# Altium PCB MX-01._AD封装.PcbDoc
Units mil, origin at the board's own origin, x right, y up, seen from the top; angles counter-clockwise.
Board outline 6000 x 4000 mil, 2 copper layers (Top, Bottom), stack 2.8 mil thick; 1 components, 0 nets, 18 pads, 0 vias.
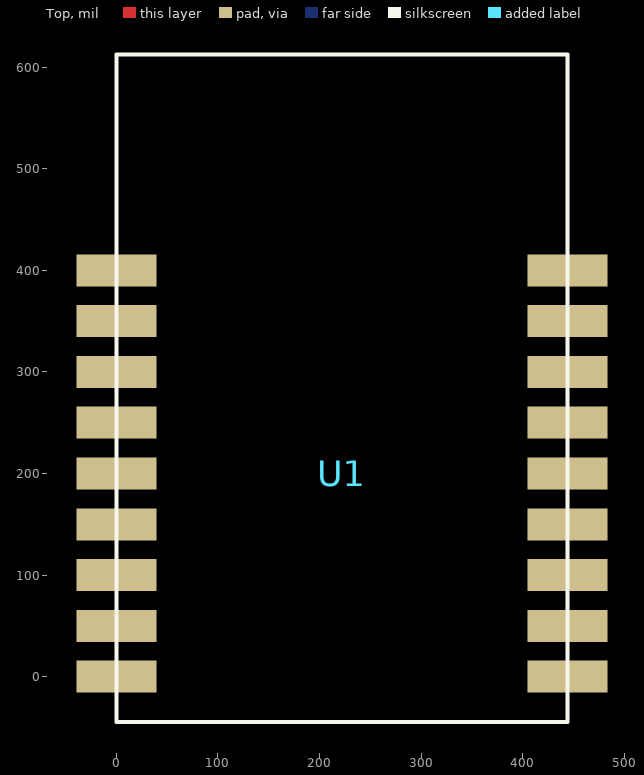
[diagram p0: Top view]
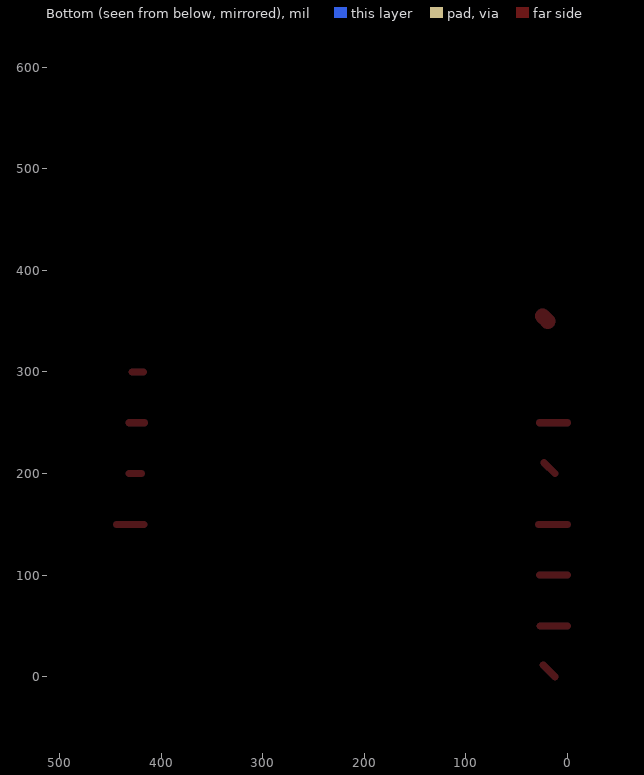
[diagram p1: Bottom view, seen from below]

## Layer stack, top to bottom
Solder Mask Top: solder mask 0.4, Solder Resist, Dk 3.5
Top: signal copper 1.4
Bottom: signal copper 1.4
Solder Mask Bottom: solder mask 0.4, Solder Resist, Dk 3.5

## Board outline
-29721.65,-30046.57 -23721.65,-30046.57 -23721.65,-26046.57 -29721.65,-26046.57

## Design rules (kind name [scope] priority, off if disabled: settings)
Clearance "Clearance - Default - DEFAULT- SMD" [IsVia vs IsSMTPin] p1: gap=12
Clearance "Clearance - Default - DEFAULT - Via" [IsVia vs IsVia] p2: gap=12
Clearance "Clearance - Default - DEFAULT - Net" [All] p3: gap=10
ComponentClearance "ComponentClearance - Default - DEFAULT" [All] p1: gap=10 collisioncheckmode=3 verticalgap=10 showdistances=FALSE
FanoutControl Fanout_Small [(CompPinCount < 5)] p3: bgadir=Out bgaviamode=Centered fanoutstyle=Auto fanoutdirection=OutThenIn viagrid=1 // Fanout_Small (Default Rule)
FanoutControl Fanout_SOIC [IsSOIC] p4: bgadir=Out bgaviamode=Centered fanoutstyle=Auto fanoutdirection=Alternating viagrid=1 // Fanout_SOIC (Default Rule)
HoleToHoleClearance "HoleToHoleClearance - Default - DEFAULT" [All] p1: gap=10 allowstackedmicrovias=TRUE
Length "Default Length" [All] p1: maxlimit=50000 minlimit=0
MaxMinImpedance "Default Impedance" [All] p1: minimum=50.00 maximum=150.0
ParallelSegment "Default Parallel Segment Adjasent" [All] p1: limit=1000 gap=200
ParallelSegment "Default Parallel Segment Same Layer" [All] p2: limit=1000 gap=200
PlaneConnect "Default PlaneConnect" [All] p1: planeconnectstyle=Relief reliefexpansion=20 reliefentries=0 reliefconductorwidth=10 reliefairgap=10
PolygonConnect "PolygonConnect - Default SMT" [IsSMTPin] p1: connectstyle=Direct reliefconductorwidth=10 reliefentries=4 polygonreliefangle="45 Angle" airgapwidth=10
PolygonConnect "PolygonConnect - Default Pad" [All] p2: connectstyle=Direct reliefconductorwidth=10 reliefentries=4 polygonreliefangle="45 Angle" airgapwidth=10
RoutingLayers "RoutingLayers - Default - DEFAULT" [All] p1: top layer_v5=TRUE bottom layer_v5=TRUE
RoutingPriority "RoutingPriority - Default - DEFAULT" [All] p1: routingpriority=0
RoutingTopology "Default Routing Topology" [All] p1: topology=Shortest
RoutingVias "RoutingVias - Default - DEFAULT" [All] p1: holewidth=28 width=50 viastyle="Through Hole" minholewidth=28 minwidth=50 maxholewidth=28 maxwidth=50
SMDToCorner "SMDToCorner - Default - DEFAULT" [All] p1: distance=120000
SolderMaskExpansion [All] p1: expansion=4
Width "Default Width" [All] p1: maxlimit=100 minlimit=6 preferedwidth=10
20 further rules are at their usual default settings.

## Components (designator, comment, footprint, x,y, rotation, side; value= is the part's Value field where it differs from the comment)
U1 "XY001" XY001 0,-24.8 r0 top

## Footprints (in the part's own frame and the unit in brackets; to place one, negate y for a bottom-side part, rotate by r counter-clockwise, add the part's x,y. Pads: shape width x height; smd on the part's side, far side on the other; paste and mask are expansions set on the pad)
XY001 [mm]
  rect 2x0.8 smd: 1(0,10.79) 2(0,9.52) 3(0,8.25) 4(0,6.98) 5(0,5.71) 6(0,4.44) 7(0,3.17) 8(0,1.9) 9(0,0.63) 10(11.28,0.63) 11(11.28,1.9) 12(11.28,3.17) 13(11.28,4.44) 14(11.28,5.71) 15(11.28,6.98) 16(11.28,8.25) 17(11.28,9.52) 18(11.28,10.79)
  Top lines w0.178: 0,1.9 0.69,1.9 ; 0,3.17 0.7,3.17 ; 0,4.44 0.72,4.44 ; 0,6.98 0.7,6.98 ; 0.317,0.63 0.607,0.92 ; 0.317,5.71 0.587,5.98 ; 10.58,6.98 10.963,6.98 ; 10.59,4.44 11.28,4.44 ; 10.6,8.25 10.887,8.25 ; 10.65,5.71 10.963,5.71
  Top lines w0.381: 0.494,9.52 0.625,9.65
  silkscreen extent 0,-0.5 11.28,16.19

## Nets (pads, with @x,y where several pads share a name; then routed paths per layer and width w, separated by ;. In a path a pad name is that pad's centre, name@x,y a point inside that pad or via, vN(x,y) a via of type N, cw(c..) or ccw(c..) an arc to the next point about the centre after c; other vN are vias at no path point)
pads on no net: U1.1 U1.2 U1.3 U1.4 U1.5 U1.6 U1.7 U1.8 U1.9 U1.10 U1.11 U1.12 U1.13 U1.14 U1.15 U1.16 U1.17 U1.18